# Altium PCB PCB2.PcbDoc
Units mm, origin at the board's own origin, x right, y up, seen from the top; angles counter-clockwise.
Board outline 73.28 x 104.78 mm, 2 copper layers (Top Layer, Bottom Layer); 38 components, 44 nets, 141 pads, 6 vias.
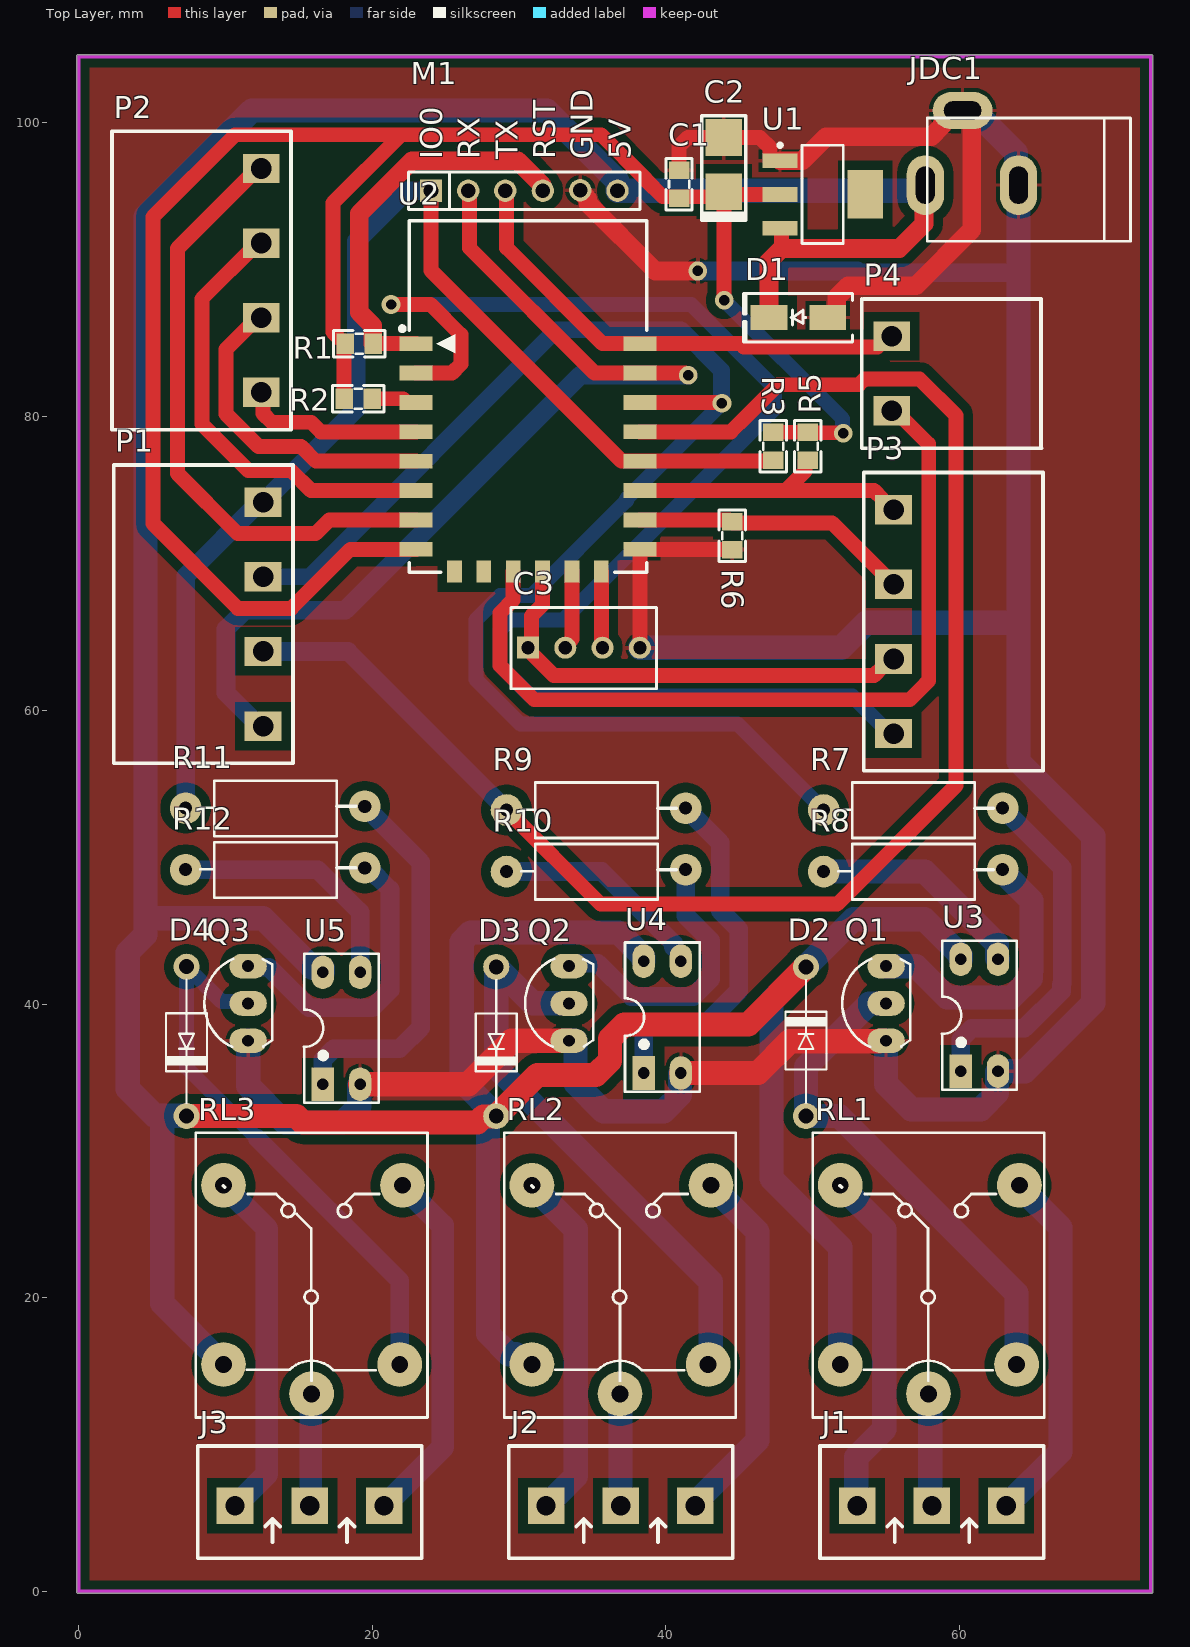
[diagram p0: Top Layer view]
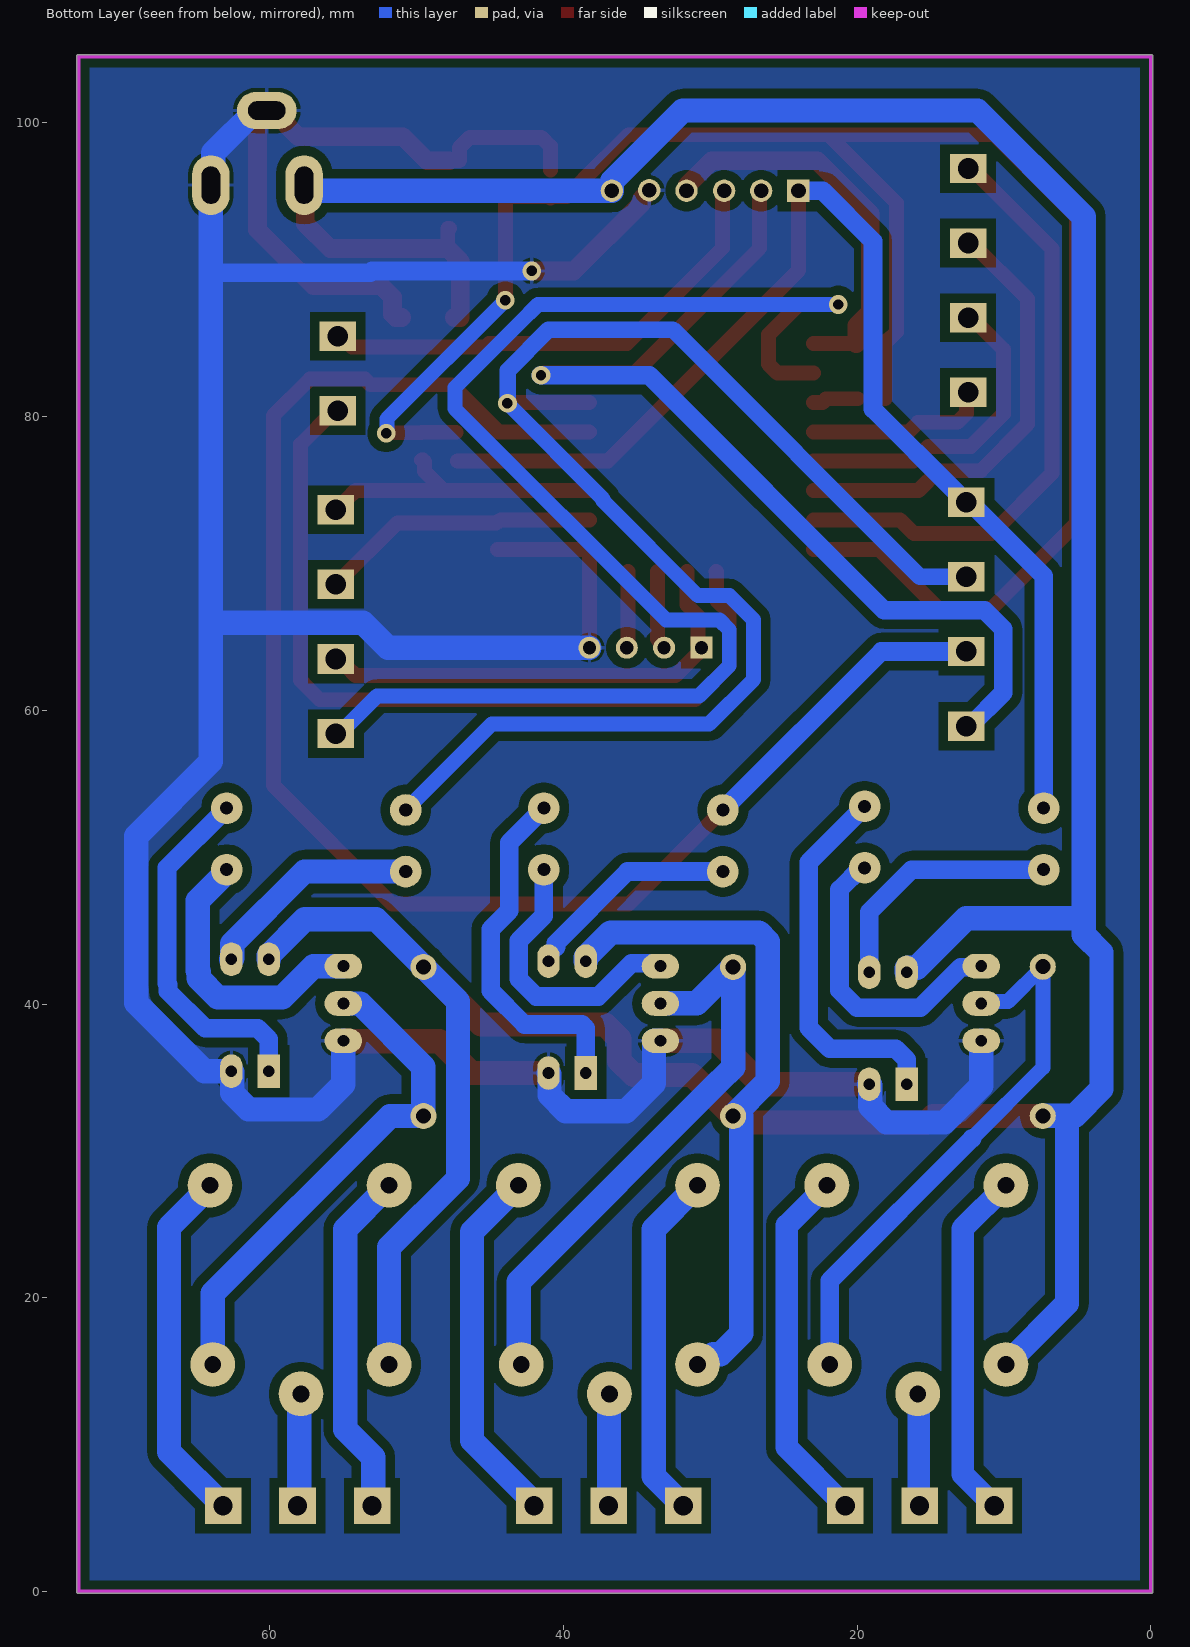
[diagram p1: Bottom Layer view, seen from below]

## Layer stack, top to bottom
Top Solder: solder mask 0.0102, Solder Resist, Dk 3.5
Top Layer: signal copper 0.0356
Dielectric 1: dielectric 0.32, FR-4, Dk 4.8
Bottom Layer: signal copper 0.0356
Bottom Solder: solder mask 0.0102, Solder Resist, Dk 3.5

## Board outline
-0.127,0 -0.127,104.521 cw(c0,104.521) 0,104.648 73.025,104.648 cw(c73.025,104.521) 73.152,104.521 73.152,0 cw(c73.025,0) 73.025,-0.127 0,-0.127 cw(c0,0)

## Design rules (kind name [scope] priority, off if disabled: settings)
Clearance [All] p1: gap=0.635 ignorepadtopadclearanceinfootprint=FALSE
PolygonConnect [All] p1: connectstyle=Relief reliefconductorwidth=0.254 reliefentries=4 polygonreliefangle="90 Angle" airgapwidth=0.254
RoutingVias [All] p1: holewidth=0.711 width=1.27 viastyle="Through Hole" minholewidth=0.711 minwidth=1.27 maxholewidth=0.711 maxwidth=1.27
SolderMaskExpansion [All] p1: expansion=0.102 istentingtop=FALSE
Width [All] p1: maxlimit=1.651 minlimit=1.016 preferedwidth=1.27
30 further rules are at their usual default settings.

## Components (designator, comment, footprint, x,y, rotation, side; value= is the part's Value field where it differs from the comment)
C1 "100nF" "tu 0805" 40.891,95.82 r90 top
C2 "100uF" "tu tantalum smd3528" 43.942,97.155 r90 top
C3 "SPI" HDR4 30.607,64.262 r0 top
D1 "SS34" "DIODE SMA" 49.022,86.741 r180 top
D2 "Diode" DIO-1A 49.53,32.372 r90 top value=1N5007
D3 "Diode" DIO-1A 28.448,42.532 r270 top value=1N5007
D4 "Diode" DIO-1A 7.366,42.545 r270 top value=1N5007
J1 "KF3" KF3-5.08 53.025,5.842 r0 top
J2 "KF3" KF3-5.08 31.847,5.842 r0 top
J3 "KF3" KF3-5.08 10.668,5.842 r0 top
JDC1 "Jac DC" DC0 60.833,98.298 r180 top
M1 "Mach nap ESP" "MACH NAP ESP" 24.003,95.377 r0 top
P1 "CON 4 EDG5.08" "CON 4 4EDG5.08" 12.573,58.928 r90 top
P2 "CON 4 EDG5.08" "CON 4 4EDG5.08" 12.446,81.648 r90 top
P3 "CON 4 EDG5.08" "CON 4 4EDG5.08" 55.499,73.66 r270 top
P4 "CON 2 EDG5.08" "CON 2 2EDG5.08" 55.372,85.471 r270 top
Q1 "C1815" TO92 54.991,40.043 r90 top value=C9014
Q2 "C1815" TO92 33.401,40.043 r90 top value=C9014
Q3 "C1815" TO92 11.557,40.043 r90 top value=C9014
R1 "10k" "tro smd 0805" 19.115,84.902 r180 top
R2 "10k" "tro smd 0805" 19.05,81.153 r180 top
R3 "10k" "tro smd 0805" 47.244,77.978 r90 top
R5 "10k" "tro smd 0805" 49.596,77.978 r90 top
R6 "10k" "tro smd 0805" 44.45,71.882 r90 top
R7 "1k" RES-1/2W 57.342,53.213 r180 top
R8 "1k" RES-1/2W 57.342,49.022 r180 top
R9 "1k" RES-1/2W 35.752,53.213 r180 top
R10 "1k" RES-1/2W 35.752,49.022 r180 top
R11 "1k" RES-1/2W 13.908,53.34 r180 top
R12 "1k" RES-1/2W 13.908,49.149 r180 top
RL1 "Relay" "Relay 5 Chan SRD" 57.874,13.462 r90 top
RL2 "Relay" "Relay 5 Chan SRD" 36.874,13.462 r90 top
RL3 "Relay" "Relay 5 Chan SRD" 15.875,13.462 r90 top
U1 "AMS1117-3.3V" SOT223 50.673,95.123 r270 top value="AMS1117-3.3V SOT223"
U2 "ESP8266 12" "ESP8266 12" 22.602,84.962 r0 top
U3 "PC817" DIP4 60.071,35.433 r0 top
U4 "PC817" DIP4 38.481,35.306 r0 top
U5 "PC817" DIP4 16.637,34.544 r0 top

## Footprints (in the part's own frame and the unit in brackets; to place one, negate y for a bottom-side part, rotate by r counter-clockwise, add the part's x,y. Pads: shape width x height; smd on the part's side, far side on the other; paste and mask are expansions set on the pad)
"CON 2 2EDG5.08" [mm]
  rect 2x2.5 hole 1.4: 1(0,0) 2(5.08,0)
  silkscreen extent -2.54,-2.03 7.62,10.21, body extent -2.5,-1.75 7.58,10.25, height 3.15
"CON 4 4EDG5.08" [mm]
  rect 2x2.5 hole 1.4: 1(0,0) 1(0,0) 2(5.08,0) 2(5.08,0) 3(10.16,0) 3(10.173,0) 4(15.24,0)
  silkscreen extent -2.54,-2.03 17.78,10.17, body extent -2.5,-1.75 17.74,10.25, height 3.15
DC0 [mil] "Jac DC input"
  oval 100x160 hole 50 slot 100 at 90 deg: 1(125,100) 2(-125,100)
  oval 160x100 hole 50 slot 100 at 0 deg: 3(25,-100)
  silkscreen extent -425,-80 120,250, body extent -410,-105 134,269, height 434
DIO-1A [mil]
  round 70 hole 40: 1(0,0) 2(400,0)
  silkscreen extent 35,-55 365,55, body extent -11,-50 411,54, height 102
"DIODE SMA" [mm] "SMA"
  rect 2.5x1.7 smd: 1(-2,0) 2(2,0)
  silkscreen extent -3.68,-1.65 3.75,1.65, body extent -2.6,-1.37 2.6,1.37, height 2.4
DIP4 [mil]
  rect 60x90 hole 31: 1(0,0)
  oval 60x90 hole 31: 2(100,0) 3(100,300) 4(0,300)
  silkscreen extent -50,-50 150,350, body extent -59,-10 159,305, height 170
"ESP8266 12" [mm] "ESP-12 Wi-Fi Module by AI-Thinker"
  rect 2.25x1 smd: 1(0.375,0) 2(0.375,-2) 3(0.375,-4) 4(0.375,-6) 5(0.375,-8) 6(0.375,-10) 7(0.375,-12) 8(0.375,-14) 15(15.625,-14) 16(15.625,-12) 17(15.625,-10) 18(15.625,-8) 19(15.625,-6) 20(15.625,-4) 21(15.625,-2) 22(15.625,0)
  rect 1x1.5 smd: 9(3,-15.5) 10(5,-15.5) 11(7,-15.5) 12(9,-15.5) 13(11,-15.5) 14(13,-15.5)
  silkscreen extent -0.7,-15.57 16.08,8.37, body extent 0,-15.49 16,8.51, height 2.75
HDR4 [mm] "Connector; Header; 4 Position"
  rect 1.5x1.5 hole 0.9: 1(0,0)
  round 1.5 hole 0.9: 2(2.54,0) 3(5.08,0) 4(7.62,0)
  silkscreen extent -1.14,-2.79 8.76,2.74, body extent -1.27,-2.92 8.89,2.88, height 11.72
KF3-5.08 [mm]
  rect 2.5x2.5 hole 1.3: 1(0,0) 2(5.08,0) 3(10.147,0)
  silkscreen extent -2.54,-3.58 12.7,4.06, body extent -2.42,-3.51 12.58,3.99, height 10
"MACH NAP ESP" [mil]
  rect 60x60 hole 39.37: 1(0,0)
  round 60 hole 39.37: 2(100,0) 3(199.21,0) 4(300,0) 5(400,1.33) 6(500,0)
  silkscreen extent -60,-50 560,50, body extent -60,-49 560,49, height 335
"Relay 5 Chan SRD" [mil] "Relay SPDT, 5 pin, 10A,W 650mil, L 800mil, H 800mil"
  round 120 hole 45: 1(0,0) 2(559.06,236.22) 3(559.06,-243.78) 4(78.74,-236.22) 5(78.74,236.22)
  silkscreen extent -63,-311 700,310, body extent -55,-306 697,304, height 602
RES-1/2W [mil]
  round 85 hole 35: 1(-220,-5) 2(260,0)
  silkscreen extent -195,-74 221,75, body extent -230,-60 270,56, height 121
SOT223 [mm]
  rect 1x2.4 smd: 1(-2.3,-2.9) 2(0,-2.9) 3(2.3,-2.9)
  rect 3.3x2.4 smd: 4(0,2.9)
  silkscreen extent -3.47,-3.02 3.35,1.4, body extent -3.25,-3.56 3.25,3.4, height 1.68
TO92 [mil] "TO-92"
  oval 66x100 hole 32: 1(-100,0) 2(0,0) 3(100,0)
  silkscreen extent -117,-65 120,118, body extent -109,-66 109,95, height 245
"tro smd 0805" [mm]
  rect 1.2x1.4 smd: 1(-0.946,-0.061) 2(0.954,-0.061)
  silkscreen extent -1.75,-0.97 1.75,0.84, body extent -1.56,-0.76 1.44,0.64, height 0.53
"tu 0805" [mm] "Compoment SMD 80x50mil"
  rect 1.2x1.4 smd: 1(-0.946,-0.003) 2(0.954,-0.003)
  silkscreen extent -1.75,-0.89 1.75,0.89, body extent -1.01,-0.64 1.01,0.63, height 0.61
"tu tantalum smd3528" [mm]
  rect 2.5x2.5 smd: 1(-1.85,0) 2(1.85,0)
  silkscreen extent -3.78,-1.5 3.33,1.5, body extent -1.85,-1.46 1.85,1.47, height 2.03

## Part data
C1: library part "Tu 0805 221 50V", "Dán", Chung_Loai=Dán, Don_Vi=Con, Ma_Hang=MH007365, So_Chan=2, Ten_Linh_Kien="Tụ 0805 221-220P 50V"
C2: library part "Tu tantalum 100uF 6.3V SMD3528", "Tu Tantalum SMD3528", Chung_Loai=Dán, Don_Vi=Con, Ma_Hang=MH007595, So_Chan=2, Ten_Linh_Kien="Tụ tantalum 107J-100uF 6.3V SMD3528"
C3: library part Header4, "Header IDC, 4 x 1 Pin Vertical 2.54mm Pitch (Non-Boxed, Male)", Manufacturer="W¨¹rth Elektronik eiSos GmbH", partNo=613002143121, ComponentLink1 Description=Manufacturer, ComponentLink1URL=http://www.we-online.com, ComponentLink2 Description=Datasheet, ComponentLink2URL=http://katalog.we-online.de/em/datasheet/6130xx143121.pdf, Created by="Karrer Zheng", Created Date="29 March 2013", NoPins=02
D1: library part "Diode SS34 ( 1N5822 )", "Dán", Chung_Loai=Dán, Don_Vi=Con, Ma_Hang=MH002104, Ten_Linh_Kien="Diode SS34 3A 40V SMA ( 1N5822 SS34A)"
D2 D3 D4: "Default Diode", Code - JEDEC=DO-214-AB, Published=8-Jun-2000, Publisher="Altium Limited", Revision="July-2002: Re-released for DXP Platform."
J1 J2 J3: Manufacturer="Würth Elektronik eiSos GmbH", partNo=691103110003, ComponentLink1 Description=Manufacturer, ComponentLink1URL=http://www.we-online.com, ComponentLink2 Description=Datasheet, ComponentLink2URL=http://katalog.we-online.de/em/datasheet/6911031100xx.pdf, Created by="Karrer Zheng", Created Date="29 October 2013", NoPins=3
JDC1: library part DCIN, "Jac DC input"
P1 P2 P3 P4: "Cắm", Chung_Loai=Cắm, Don_Vi=Con
  P1 P2 P3: Ma_Hang=MH000979, Ten_Linh_Kien="CON 4 2EDG5.08-4P 5.08MM ( Xanh Cong)"
  P4: Ma_Hang=MH000759, Ten_Linh_Kien="CON 2 2EDG5.08-2P 5.08MM ( Xanh Cong)"
Q1 Q2 Q3: library part "Trans C1815 DIP", "NPN transistor"
R1 R2 R3 R5 R6: library part "Tro 0805 5% 12k", "Dán", Chung_Loai=Dán, Don_Vi=Con, Ma_Hang=MH005241, So_Chan=2, Ten_Linh_Kien="Trở 0805 5% 12k"
R7 R8 R9 R10 R11 R12: library part Res, "Res", Manufacturer="Generic Components", Class=Passive, Published=08/06/2000, Publisher="Altium Hobart Technology Centre", SubClass=R
RL1 RL2 RL3: library part "Relay 5 Chan SRD", "Relay 5 Chan", Ma_Hang=MH009374, Ten="Relay 5V10A SRD-05VDC-SL-C Chính Hãng"
U1: library part "AMS1117 SMD", "Dán", Chung_Loai=Dán, Don_Vi=Con, Ma_Hang=MH000596
U2: "ESP8266 12 22 Pin", IC=ESP8266-EX, Vendor=Ai-thinker
U3 U4 U5: "Single Opto"
M1: ComponentLink1Description=Datasheet, ComponentLink1URL=https://linhkienthuduc.com/san-pham/usb-uart-ch340-kiem-mach-nap-esp32-esp8266-cong-type-c-v1/

## Via types
v1: diameter 1.27, hole 0.711, Top Layer to Bottom Layer, 6 vias

## Nets (pads, with @x,y where several pads share a name; then routed paths per layer and width w, separated by ;. In a path a pad name is that pad's centre, name@x,y a point inside that pad or via, vN(x,y) a via of type N, cw(c..) or ccw(c..) an arc to the next point about the centre after c; other vN are vias at no path point)
+3.3: C1.1 C2.1 R1.2 R2.2 R3.2 R5.2 U1.2 U2.8 | length 134.6
  Top Layer w1.016: R2.2 R1.2@18.096,85.128 ; R1.2 18.161,85.063 18.069,85.155 17.934,85.155 17.339,85.75 17.339,94.548 21.978,99.187 ; U2.8 18.511,70.962 14.494,66.945 10.85,66.945 5.08,72.715 5.08,93.599 10.668,99.187 21.978,99.187 ; v1(43.967,87.909) 43.955,87.922 43.955,95.11 C2.1@43.942,95.123 ; R3.2 R5.2 49.69,78.9 52.037,78.9 v1(52.07,78.867) ; U1.2 C2.1@43.942,95.123 ; 21.978,99.187 35.587,99.187 38.639,96.135 38.639,96.113 39.786,94.966 40.802,94.966 C1.1 40.986,94.966 43.785,94.966 C2.1@43.942,95.123
  Bottom Layer w1.016: v1(43.967,87.909) 52.029,79.847 52.029,78.908 v1(52.07,78.867)
+5: D1.2 D2.2 D3.2 D4.2 JDC1.1 M1.6 RL1.5 RL2.5 RL3.5 U1.3 U3.4 U4.4 U5.4 | length 311.7
  Top Layer w1.016: U1.3 47.871,92.823 47.879,92.815 47.879,91.44
  Top Layer w1.27: D1.2@47.422,86.741 D1.2 47.022,90.583 47.879,91.44 55.88,91.44 57.572,93.132 57.572,95.672 JDC1.1
  Top Layer w1.651: D4.2@7.4,32.385 14.826,32.385 15.27,31.941 27.164,31.941 27.572,32.348 28.398,32.348 D3.2@28.435,32.385 ; D3.2 31.255,35.179 35.228,35.179 36.195,36.146 36.195,37.641 37.162,38.608 45.606,38.608 D2.2
  Bottom Layer w1.651: 4.572,45.847 12.573,45.847 15.938,42.482 16.573,42.482 16.637,42.418 U5.4 ; D4.2 7.354,32.397 5.691,32.397 ; RL3.5 5.715,19.622 5.715,32.372 5.691,32.397 ; D3.2@27.89,32.372 27.89,17.576 29.306,16.161 29.798,16.161 30.496,15.462 RL2.5 ; D3.2 28.448,32.407 26.098,34.756 26.098,44.267 26.713,44.882 36.779,44.882 38.481,43.18 U4.4 ; RL1.5 51.874,23.437 47.18,28.131 47.18,40.183 D2.2 52.768,45.771 57.607,45.771 60.071,43.307 U3.4 ; JDC1.1 57.277,95.377 M1.6 36.703,96.014 31.879,100.838 11.811,100.838 4.572,93.599 4.572,44.712 3.365,43.505 3.365,34.227 5.195,32.397 5.691,32.397
ADC: P3.4 U2.2 | length 96.9
  Top Layer w1.016: v1(21.284,87.63) 23.983,87.63 26.035,85.578 26.035,83.565 25.44,82.97 22.985,82.97 U2.2
  Bottom Layer w1.016: v1(21.284,87.63) 41.732,87.63 43.002,86.36 47.395,81.967 47.395,80.542 33.008,66.155 31.533,66.155 29.384,66.155 28.714,65.485 28.714,63.039 30.777,60.975 52.694,60.975 55.249,58.42 P3.4
CLK: C3.3 U2.14 | length 5.2
  Top Layer w1.016: U2.14 35.61,69.454 35.61,64.339 C3.3
CS: C1.2 C2.2 C3.4 D1.1 JDC1.2 JDC1.3 M1.5 Q1.1 Q2.1 Q3.1 R6.1 U1.1 U2.15 U3.2 U4.2 U5.2 | length 260.6
  Top Layer w1.016: C3.4 U2.15 38.235,70.954 44.493,70.954 R6.1 ; C1.2 40.894,98.41 41.489,99.005 C2.2 46.395,99.005 47.081,98.319 47.081,97.431 47.089,97.423 U1.1
  Top Layer w1.27: M1.5 34.163,95.342 34.671,94.834 34.671,94.535 39.29,89.916 v1(42.164,89.916) ; U1.1 49.29,97.423 50.927,99.06 58.057,99.06 58.801,99.804 58.801,99.859 59.78,100.838 JDC1.3 60.246,100.838 60.833,100.251 60.833,92.71 57.023,88.9 52.419,88.9 51.637,88.118 51.637,86.956 51.422,86.741 D1.1
  Top Layer w1.651: U5.2 26.535,34.544 29.494,37.503 Q2.1 ; U4.2 46.275,35.306 48.434,37.465 54.514,37.465 54.547,37.498 54.857,37.498 Q1.1@54.864,37.491
  Bottom Layer w1.27: v1(42.164,89.916) 53.023,89.916 53.149,89.789 64.008,89.789
  Bottom Layer w1.651: Q3.1 11.557,34.439 14.056,31.941 18.004,31.941 19.113,33.05 19.113,34.48 U5.2 ; Q2.1 33.826,37.503 33.838,37.491 33.838,34.606 35.742,32.703 39.848,32.703 40.957,33.812 40.957,35.242 U4.2 ; C3.4 51.946,64.262 53.644,65.961 64.008,65.961 ; Q1.1 54.991,34.544 56.706,32.829 61.438,32.829 62.547,33.939 62.547,35.369 U3.2 64.442,35.433 69.088,40.079 69.088,51.435 64.008,56.515 64.008,65.961 ; JDC1.3 60.96,100.838 63.838,97.96 63.838,95.928 JDC1.2 64.008,89.789 64.008,65.961
CS0: U2.9
GPIO0: M1.1 P1.4 R3.1 R11.2 U2.18 | length 84.3
  Top Layer w1.016: M1.1 24.003,89.945 36.978,76.97 38.219,76.97 U2.18 R3.1@47.234,76.962
  Bottom Layer w1.27: R11.2 7.304,69.149 12.323,74.168 P1.4 12.823,74.168 13.188,74.533 13.188,74.783 18.923,80.518 18.923,91.948 22.352,95.377 M1.1
GPIO01: M1.3 P4.1 U2.22 | length 33.2
  Top Layer w1.016: M1.3 29.16,95.28 29.16,91.49 35.688,84.962 45.085,84.962 45.299,84.748 54.399,84.748 55.122,85.471 P4.1
GPIO02: P3.1 R5.1 U2.17 | length 20.7
  Top Layer w1.016: U2.17 48.151,74.962 ; R5.1 49.557,77.032 49.465,76.94 49.465,76.276 48.151,74.962 ; P3.1@55.499,73.66 55.249,73.66 54.757,74.152 54.757,74.367 54.162,74.962 48.151,74.962
GPIO03: M1.2 P1.1 U2.21 | length 68.9
  Top Layer w1.016: M1.2 26.64,95.28 26.64,91.47 35.14,82.97 38.219,82.97 38.235,82.954 38.243,82.962 41.302,82.962 41.46,82.804 v1(41.529,82.804)
  Bottom Layer w1.27: P1.1@12.573,58.928 12.323,58.928 10.053,61.198 10.053,65.534 11.337,66.818 18.177,66.818 34.163,82.804 v1(41.529,82.804)
GPIO04: P1.2 R9.2 U2.19 | length 106.9
  Top Layer w1.016: R9.2 35.561,46.799 51.658,46.799 59.746,54.887 59.746,80.081 57.277,82.55 53.516,82.55 53.135,82.169 47.625,82.169 46.131,80.675 45.462,80.006 44.418,78.962 U2.19
  Bottom Layer w1.27: P1.2@12.573,64.008 18.353,64.008 R9.2
GPIO05: P1.3 R7.2 U2.20 | length 101.5
  Top Layer w1.016: U2.20 43.683,80.962 43.698,80.948 43.738,80.948 v1@43.752,80.962
  Bottom Layer w1.016: v1(43.815,80.899) 37.308,74.392 37.308,74.265 30.849,67.806 28.7,67.806 27.063,66.169 27.063,62.091 30.087,59.067 44.884,59.067 R7.2
  Bottom Layer w1.143: P1.3@12.573,69.101 12.586,69.088 15.73,69.088 32.558,85.915 41.022,85.915 43.791,83.147 43.791,80.923 v1(43.815,80.899)
GPIO09: P4.2 U2.11 | length 57
  Top Layer w1.016: U2.11 29.594,69.454 29.594,67.515 28.714,66.635 28.714,63.039 31.035,60.718 56.596,60.718 57.658,61.78 57.658,61.793 57.892,62.027 57.892,78.121 55.622,80.391 P4.2
GPIO12: P2.3 U2.6 | length 30.6
  Top Layer w1.016: P2.3@12.446,91.808 12.196,91.808 8.402,88.014 8.402,79.491 11.582,76.311 14.482,76.311 15.831,74.962 U2.6
GPIO13: P2.4 U2.7 | length 41.6
  Top Layer w1.016: P2.4 12.196,96.888 6.751,91.443 6.751,76.124 10.85,72.025 16.14,72.025 17.077,72.962 U2.7
GPIO14: P2.2 U2.5 | length 21.9
  Top Layer w1.016: P2.2@12.446,86.728 12.196,86.728 10.053,84.585 10.053,80.175 12.266,77.962 15.166,77.962 16.166,76.962 U2.5
GPIO15: P3.2 R6.2 U2.16 | length 19.1
  Top Layer w1.016: U2.16 44.285,72.962 44.411,72.836 R6.2 44.587,72.76 51.319,72.76 P3.2@55.499,68.58
GPIO16: P2.1 U2.4 | length 12.4
  Top Layer w1.016: P2.1@12.446,81.648 12.573,81.521 12.573,80.208 13.168,79.613 15.85,79.613 16.501,78.962 U2.4
MISO: U2.10
NetD2_1: D2.1 Q1.2 RL1.4 | length 34.8
  Bottom Layer w1.651: Q1.2 54.986,40.038 53.843,40.038 49.543,35.738 49.543,32.385 D2.1 51.816,32.372 63.874,20.314 RL1.4
NetD3_1: D3.1 Q2.2 RL2.4 | length 39.2
  Bottom Layer w1.651: Q2.2 33.396,40.048 30.932,40.048 D3.1 28.448,35.689 29.415,34.722 29.421,34.722 43.053,21.09 43.053,15.641 RL2.4
NetD4_1: D4.1 Q3.2 RL3.4 | length 38.3
  Bottom Layer w1.016: Q3.2 11.431,40.169 9.742,40.169 D4.1 7.366,35.667 12.182,30.851
  Bottom Layer w1.27: 12.182,30.851 21.875,21.158 RL3.4
NetJ1_1: J1.1 RL1.2 | length 23.9
  Bottom Layer w1.651: RL1.2 54.858,24.678 54.858,11.043 52.959,9.144 52.959,5.908 J1.1
NetJ1_2: J1.2 RL1.1 | length 7.7
  Bottom Layer w1.651: RL1.1 57.989,13.346 57.989,5.958 J1.2
NetJ1_3: J1.3 RL1.3 | length 24.5
  Bottom Layer w1.651: J1.3 66.858,9.528 66.858,24.797 64.066,27.589 RL1.3
NetJ2_1: J2.1 RL2.2 | length 23.9
  Bottom Layer w1.651: RL2.2 33.859,24.678 33.859,7.854 J2.1
NetJ2_2: J2.2 RL2.1 | length 7.6
  Bottom Layer w1.651: RL2.1 36.9,13.436 36.9,5.868 J2.2
NetJ2_3: J2.3 RL2.3 | length 24.9
  Bottom Layer w1.651: J2.3 42.418,6.267 42.418,6.477 46.228,10.287 46.228,24.5 RL2.3
NetJ3_1: J3.1 RL3.2 | length 23.9
  Bottom Layer w1.524: RL3.2 12.827,24.71 12.827,8.001 J3.1
NetJ3_2: J3.2 RL3.1 | length 7.7
  Bottom Layer w1.524: J3.2 15.811,5.905 15.811,13.399 RL3.1
NetJ3_3: J3.3 RL3.3 | length 24.6
  Bottom Layer w1.524: J3.3 24.796,9.823 24.796,24.933 RL3.3
NetQ1_3: Q1.3 R8.1 | length 19.5
  Bottom Layer w1.651: Q1.3 54.996,42.578 57.022,42.578 59.15,40.45 63.532,40.45 64.834,41.751 64.834,42.2 64.897,42.264 64.897,47.044 62.93,49.012 R8.1
NetQ2_3: Q2.3 R10.1 | length 19.2
  Bottom Layer w1.27: Q2.3@33.401,42.786 35.366,42.786 37.639,40.513 41.863,40.513 43.053,41.703 43.053,44.303 41.34,46.016 R10.1
NetQ3_3: Q3.3 R12.1 | length 20.5
  Bottom Layer w1.27: Q3.3 11.635,42.505 12.951,42.505 15.706,39.751 20.019,39.751 21.209,40.941 21.209,47.803 19.736,49.276 R12.1
NetR2_1: R2.1 U2.3 | length 3.1
  Top Layer w1.016: R2.1 22.116,81.214 22.368,80.962 U2.3
NetR7_1: R7.1 U3.1 | length 24.6
  Bottom Layer w1.27: U3.1 60.071,37.61 60.815,38.354 64.4,38.354 66.929,40.883 66.929,41.332 66.992,41.396 66.992,49.277 R7.1
NetR8_2: R8.2 U3.3 | length 14.9
  Bottom Layer w1.651: R8.2 57.626,49.022 62.547,44.101 62.547,43.116 U3.3
NetR9_1: R9.1 U4.1 | length 24.5
  Bottom Layer w1.27: U4.1 38.481,38.354 38.735,38.608 42.652,38.608 44.958,40.914 44.958,45.092 43.689,46.36 43.689,50.99 R9.1
NetR10_2: R10.2 U4.3 | length 14.8
  Bottom Layer w1.27: R10.2 35.64,49.022 40.513,44.149 40.513,43.884 41.021,43.376 U4.3
NetR11_1: R11.1 U5.1 | length 25.9
  Bottom Layer w1.27: U5.1 16.637,36.213 17.381,36.957 21.862,36.957 23.304,38.399 23.304,49.658 R11.1
NetR12_2: R12.2 U5.3 | length 17.2
  Bottom Layer w1.27: R12.2 16.3,49.149 19.177,46.272 U5.3
RST: M1.4 R1.1 U2.1 | length 27.2
  Top Layer w1.016: R1.1 U2.1
  Top Layer w1.27: R1.1 20.031,84.993 20.031,86.189 19.117,87.103 19.117,93.811 22.715,97.409 29.905,97.409 31.574,95.739 31.574,95.426 M1.4
"SPI INT": C3.2 U2.13 | length 5.4
  Top Layer w1.016: C3.2 33.147,64.393 33.602,64.848 U2.13
SPI_CS: C3.1 P3.3 U2.12 | length 31.9
  Top Layer w1.016: U2.12 31.602,67.188 30.849,66.435 30.849,64.504 C3.1 30.849,64.02 30.849,63.883 32.363,62.369 54.162,62.369 54.757,62.964 54.757,63.008 55.249,63.5 P3.3@55.499,63.5
pads on no net: U1.4

## Polygon pours and split planes (outlines as drawn)
CS on Top Layer "NONET_L-01_P-001" (solid, remove dead copper, pour order 1): 0,104.521 0,0 73.025,0 73.025,104.394 72.898,104.521
CS on Bottom Layer "NONET_L-01_P-001" (solid, remove dead copper, pour order 2): 0.127,104.521 0,104.394 0,0 73.025,0 73.025,104.521

## Keep-outs
Keep-Out Layer:
  lines w0.254: 0,0 0,104.521 67.437,104.521 73.025,104.521 73.025,102.743 73.025,0 72.898,0 0,0

## Text inside footprints (layer, text, board x,y; h text height)
M1: Top Overlay "IO0" at 24.765,97.536 h1.52 r90; Top Overlay "RX" at 27.33,97.536 h1.52 r90; Top Overlay "TX" at 29.896,97.536 h1.52 r90; Top Overlay "RST" at 32.461,97.536 h1.52 r90; Top Overlay "GND" at 35.027,97.536 h1.52 r90; Top Overlay "5V" at 37.592,97.536 h1.52 r90
U2: Mechanical 13 "CUTOUT POLYGON" at 22.729,92.328 h0.25; Mechanical 13 "ANTENNA AREA" at 22.729,92.836 h0.25